# Altium PCB PCB2.PcbDoc (part 3 of 3)
Units mm, origin at the board's own origin, x right, y up, seen from the top; angles counter-clockwise.
Board outline 227.2 x 157.1 mm, 2 copper layers (Top Layer, Bottom Layer); 299 components, 0 nets, 1015 pads, 1172 vias.
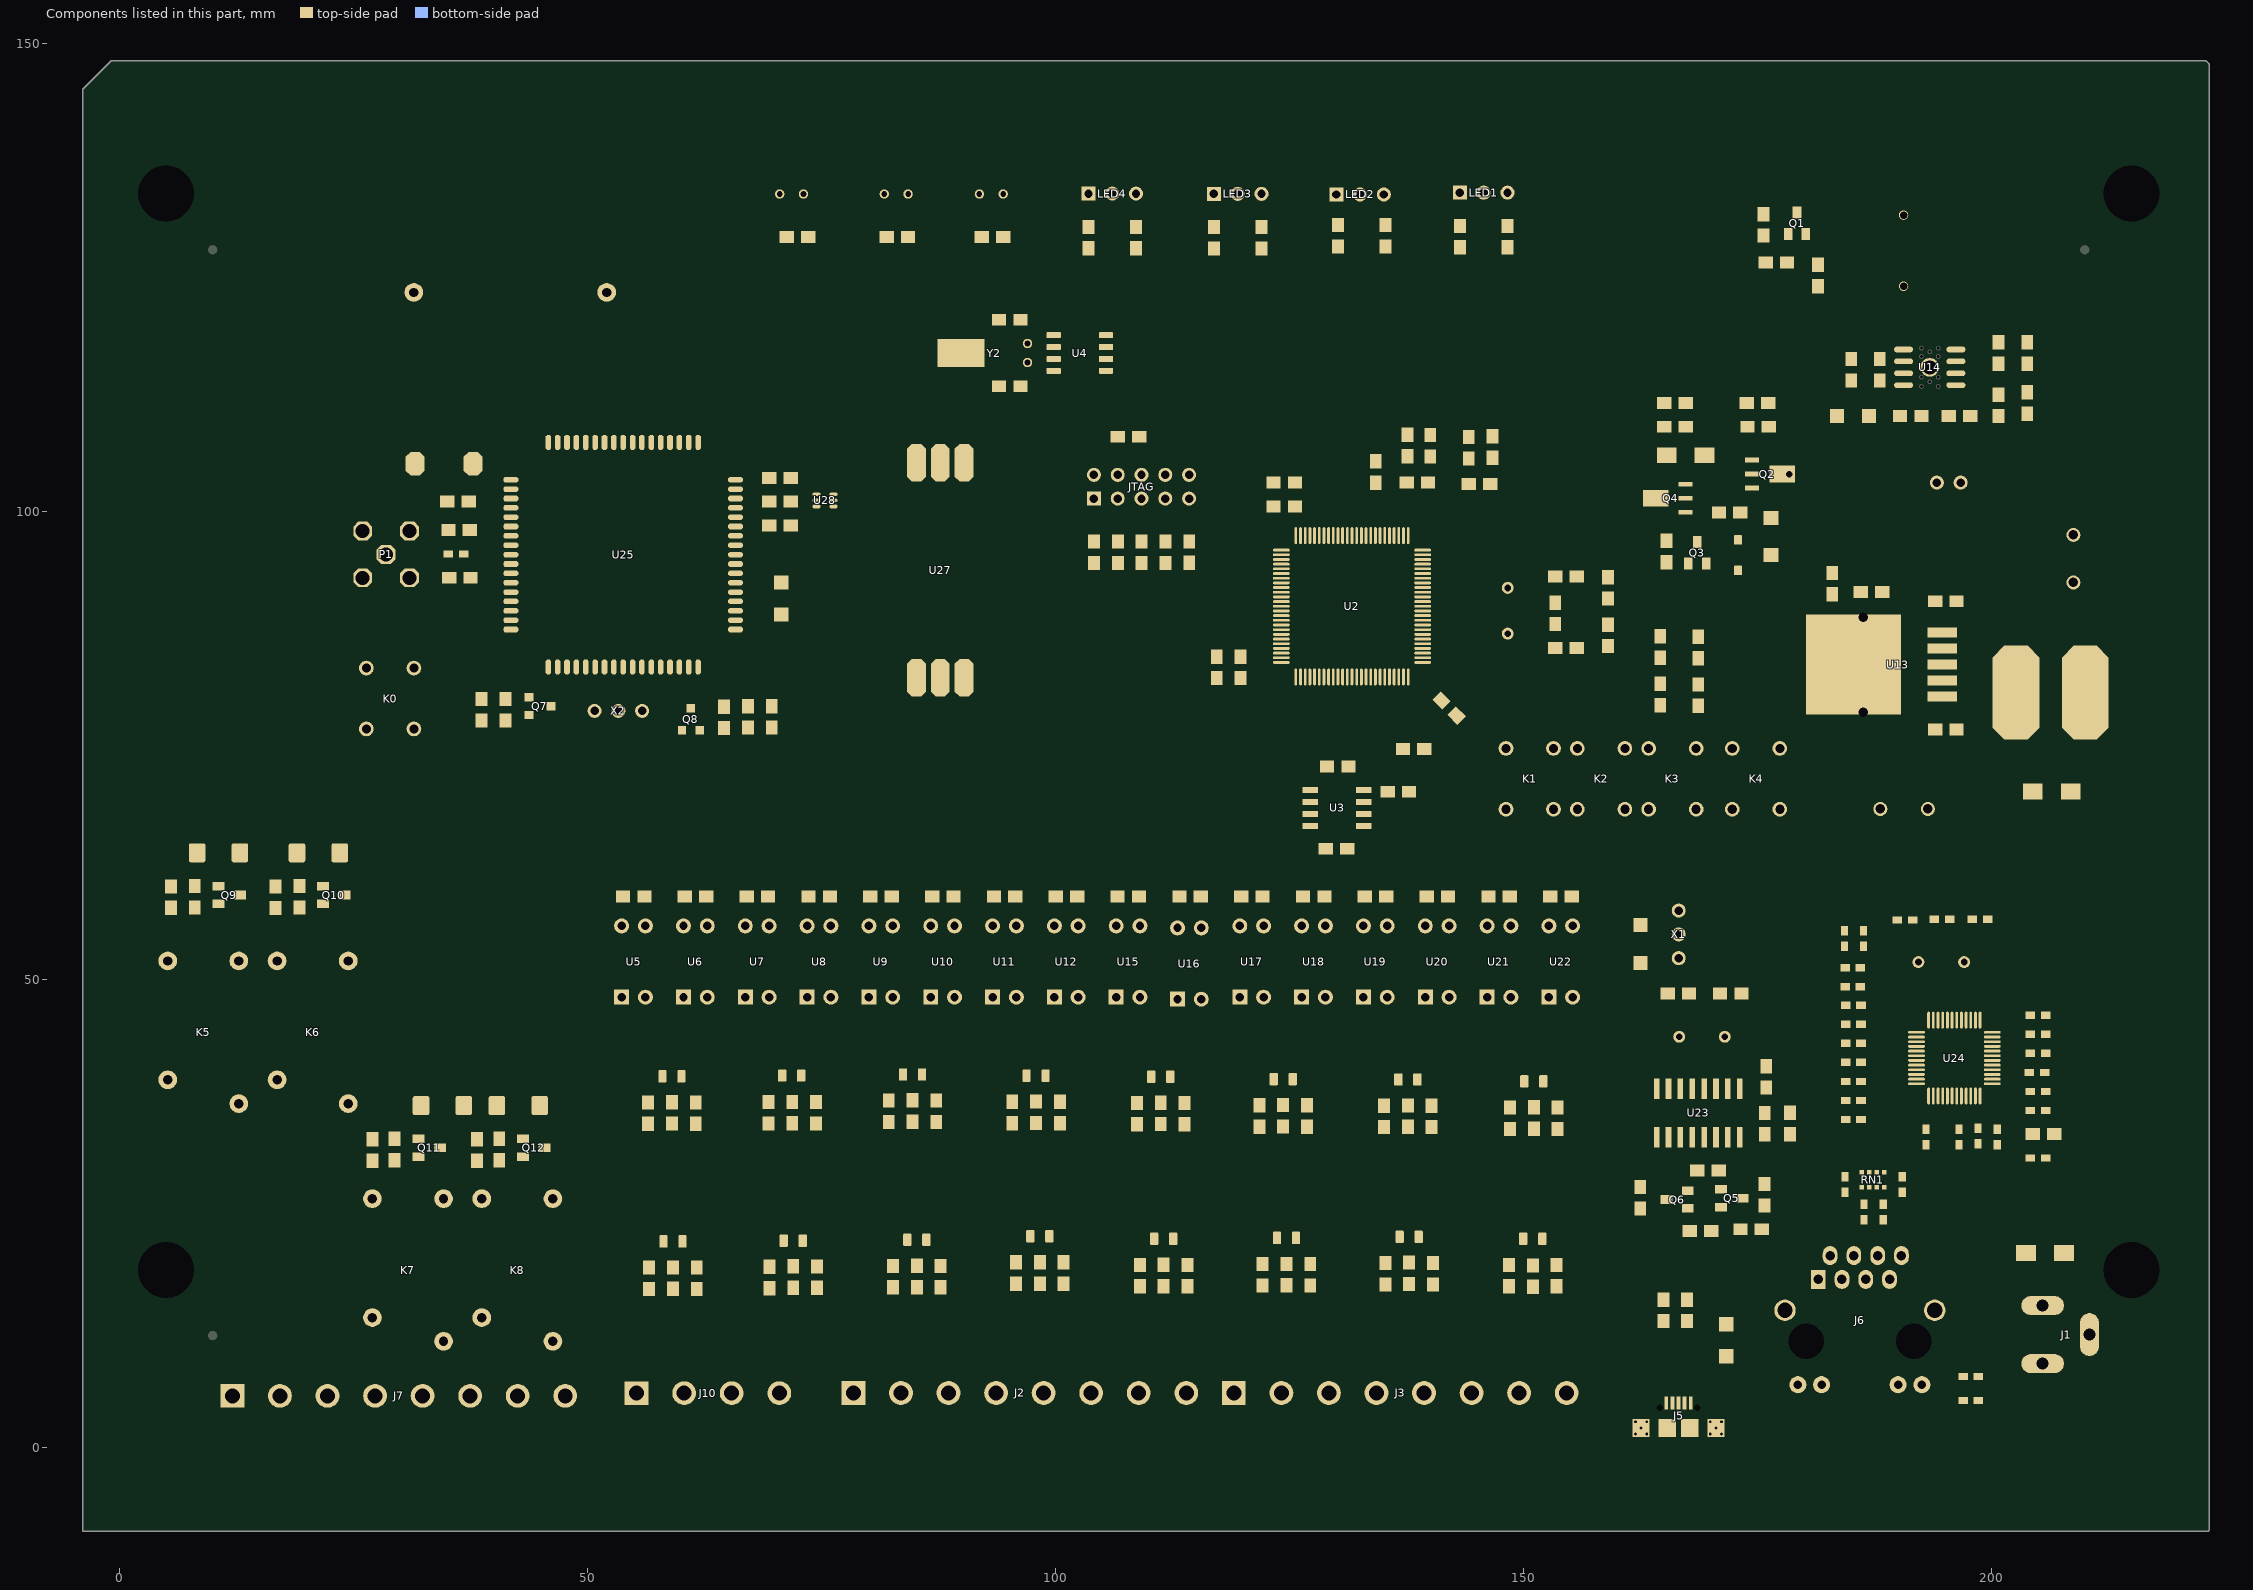
[diagram p3: the components of this part, seen from the top]

## Via types
v1: diameter 0.5, hole 0.3, Top Layer to Bottom Layer, tented both sides, 1160 vias
v2: diameter 1, hole 0.5, Top Layer to Bottom Layer, tented both sides, 8 vias
v3: diameter 0.7, hole 0.5, Top Layer to Bottom Layer, tented both sides, 2 vias
v4: diameter 0.7, hole 0.3, Top Layer to Bottom Layer, tented both sides, 1 vias
v5: diameter 1.2, hole 0.5, Top Layer to Bottom Layer, tented both sides, 1 vias

## Nets (pads, with @x,y where several pads share a name; then routed paths per layer and width w, separated by ;. In a path a pad name is that pad's centre, name@x,y a point inside that pad or via, vN(x,y) a via of type N, cw(c..) or ccw(c..) an arc to the next point about the centre after c; other vN are vias at no path point) (continued)
copper on no net: (continued)
  other v1: 15.2,2.003 160,2.003 176,2.003 20.3,2.203 25.2,2.203 30.1,2.203 35.4,2.303 40.3,2.303 45.2,2.303 48.6,2.303 180,2.503 183.5,2.503 186.5,2.503 192.5,2.503 199,2.503 189.5,3.003 202.5,3.003 205,3.003 207.5,3.003 215,3.503 172,4.003 211.5,4.003 174.7,4.503 217.5,5.503 161,7.003 184.5,7.003 175.8,7.303 211.5,7.503 187.9,8.003 168.7,8.403 71.3,8.703 49.2,8.803 54.8,9.203 194.9,9.203 162,10.003 74.8,11.003 54.2,11.103 168.9,11.203 68.2,11.403 176.3,11.503 213.5,11.803 184,12.003 203.5,12.003 205.5,12.003 207.5,12.003 42.6,12.203 217.2,12.403 49.3,12.503 96.7,12.703 101.8,12.703 198.8,12.803 161,13.003 196.6,13.203 215.6,14.003 53.1,14.203 43.4,14.903 184,15.003 48.4,15.203 180.6,15.203 175.7,15.603 199.2,16.203 212,16.403 57.75,16.987 70.75,17.063 84,17.163 110.25,17.263 149.75,17.263 123.5,17.363 136.5,17.471 196.8,17.503 97,17.539 161,18.003 163,18.003 169,18.003 171.8,18.003 178,18.003 40.2,18.103 45.7,18.203 179.1,19.003 14.6,19.203 173.1,19.303 199.4,19.403 41.8,20.403 64.5,20.603 192.8,20.903 78.2,21.103 91.5,21.403 165,21.503 200.3,21.503 104.9,21.603 118.2,21.603 49.4,21.703 180,21.903 52.6,22.103 144.5,22.203 131,22.403 66.2,22.503 163.9,22.603 63.2,22.703 76.2,22.803 162.5,23.003 90.1,23.203 80,23.403 14.5,23.603 93.2,23.603 47.5,23.903 194.8,24.103 103.9,24.203 107.9,24.403 116,24.403 120,24.503 128.8,24.803 208.8,24.803 8.2,25.003 217,25.003 134.2,25.103 143.5,25.103 169.4,25.303 32,25.503 49.2,25.503 179.8,25.503 183.4,25.503 190.7,25.503 148.7,25.603 184.7,25.803 194,25.903 196.2,26.303 3.8,26.403 169.4,26.503 30.5,26.903 198.4,27.103 14.4,27.303 32.5,27.403 209.8,27.503 193.6,27.703 169.4,27.803 43.6,27.903 180.5,27.903 217.5,28.253 49,28.403 31.1,28.803 179.6,28.903 194.8,29.103 211.8,29.103 8.6,29.203 42.4,29.403 59.6,29.503 5.5,29.603 161.9,29.803 70,30.103 193.4,30.103 66.6,30.203 176.7,30.303 180.6,30.303 79.2,30.403 84.4,30.403 14.5,30.603 195.4,30.703 173,31.003 197.5,31.003 199.5,31.003 202.25,31.003 207.25,31.003 164.1,31.103 176.7,31.203 49.2,31.303 57.7,31.303 179.6,31.303 77.3,31.503 91.8,31.503 95.9,31.603 98.2,31.703 103.4,31.703 106.3,31.703 111.9,31.703 217.5,31.753 63.8,31.903 81.5,31.903 109.7,31.903 68.3,32.003 71.8,32.003 120.5,32.103 122.6,32.103 124.6,32.103 116.1,32.203 118.4,32.203 78.7,32.303 89.1,32.303 138.5,32.303 4.1,32.403 85.4,32.403 134.8,32.403 161.9,32.403 180.5,32.503 83.5,32.603 130.6,32.603 66.1,32.703 202.3,32.703 185.8,33.103 48.9,34.403 32.4,34.503 34.2,34.503 70.5,34.503 30.7,34.603 42.8,34.603 44,34.603 57.75,34.623 39.4,34.703 96.75,34.691 83.5,34.823 217.5,35.003 165.5,35.503 164,36.003 170,36.003 171.5,36.003 173,36.003 47.8,36.403 207,37.003 211.5,37.003 146.1,37.203 116,37.503 178,37.503 143.3,37.603 103.6,37.703 105.5,37.703 119.5,37.703 131.4,37.903 22.3,38.403 91.4,38.403 190.5,38.503 211.75,38.503 218.5,38.503 65.6,38.703 78.6,38.703 117.3,38.703 129,38.703 30.8,38.803 10.7,38.903 190.2,39.203 207,39.253 104.4,39.303 48,39.503 11.1,39.603 90.6,39.603 14.2,39.703 63.7,39.703 195.75,39.753 32,40.003 76.9,40.003 23.8,40.103 8.6,40.203 201.737,40.316 196.467,40.401 178,40.503 45.8,40.603 34.3,40.703 42.2,41.003 207,41.003 211.75,41.003 65.9,41.203 194.5,41.253 195.75,41.253 35.7,41.603 57.7,41.903 59.7,41.903 5.8,42.003 183.5,42.003 22.4,42.103 196.467,42.123 13.3,42.203 10.7,42.403 48.4,42.503 9.2,42.703 32.1,42.703 43.9,42.703 18,42.803 15.8,43.103 207,43.253 28,43.303 196.467,43.451 177.5,43.503 211.75,43.503 218.5,43.503 41.9,43.803 183.5,44.003 35.8,44.203 45.7,44.603 5.9,44.803 17.7,44.803 48,44.803 32.4,45.103 207,45.253 25.1,45.403 199.8,45.403 27.5,45.503 11.2,45.703 40.4,46.003 178,46.003 183.5,46.003 211.75,46.003 8.6,46.103 35.6,46.103 15,46.203 168,46.503 169.5,46.503 171,46.503 44.1,46.703 45.4,47.003 23.3,47.303 27.4,47.303 32.5,47.303 197.3,47.903 183.5,48.003 218.5,48.003 25.4,48.103 48.6,48.103 177.5,48.503 210,48.503 42,48.703 197.75,48.753 35.7,49.003 163.7,49.203 31.7,49.803 166.6,50.203 175.4,50.303 199,50.503 204.5,50.503 208,50.503 212,50.503 40.8,50.603 44.4,50.703 168.8,50.703 159,50.903 33.2,51.003 48.2,51.203 164.5,51.203 195,51.253 36.3,51.503 170.5,52.003 199,52.003 157.5,52.103 172.8,52.503 180,52.503 194.75,52.503 27.1,52.903 218.5,53.003 158.8,53.303 14.8,53.503 191,53.503 199,53.503 206,53.503 210,53.503 178.5,54.003 170.4,54.103 10.2,54.203 2.3,54.303 21.4,54.303 26.1,54.603 190.25,54.753 193.75,54.753 195.25,54.753 14.6,55.303 27.8,55.303 158.9,55.403 177,55.503 19.6,55.603 36.4,55.603 50.9,55.703 8.3,55.803 10,55.903 34,55.903 40.3,56.203 46,56.203 21.8,56.403 169.6,56.403 212,56.503 31.3,56.603 11.2,56.703 204.5,57.003 208,57.003 14.5,57.303 174.9,57.403 158.9,57.503 48.3,57.603 161.7,57.703 43.4,57.803 36.2,57.903 27.7,58.003 218.5,58.003 2.4,58.103 34.3,58.203 31.8,58.903 50.9,59.003 181.6,59.203 40.8,59.403 45.2,59.503 189,59.503 198.5,59.503 210,59.503 36.2,59.703 196,60.003 206.5,60.003 164.7,60.103 111.3,60.303 27.5,60.503 118.7,60.503 191.5,60.503 194.5,60.503 171.9,60.603 70.3,60.703 83.5,60.703 117.2,60.703 154.5,60.703 156.1,60.703 85.1,60.803 103.1,60.803 104.6,60.803 56.8,60.903 58.7,60.903 62.7,60.903 64.7,60.903 81.9,60.903 94.8,60.903 78,61.003 97,61.003 212,61.003 47.7,61.103 98.6,61.103 68.5,61.203 76.1,61.203 33.9,61.403 91.5,61.403 41.1,61.503 50.8,61.503 127.2,61.503 129.3,61.503 131.4,61.503 188.5,61.503 198.5,61.503 204,61.503 88.6,61.603 90.2,61.603 71.8,61.803 118.6,61.803 119.6,61.803 162.8,61.803 44.9,62.003 122.5,62.003 184.5,62.003 193.5,62.003 70.3,62.103 81.9,62.103 55.5,62.203 85.1,62.203 83.4,62.303 133.8,62.403 57.7,62.503 196,62.503 62.1,62.603 63.9,62.603 65.6,62.603 75.1,62.603 77.1,62.703 78.8,62.703 32.1,62.803 170.5,62.803 157.5,62.903 190,63.003 207,63.003 210.5,63.003 179.5,63.103 2.9,63.203 26.9,63.203 70.9,63.403 186.5,63.503 218.5,63.503 35.8,63.603 119.6,63.703 122.5,64.003 126.8,64.003 182,64.003 191.5,64.003 198.5,64.003 204,64.003 26.2,64.503 184.5,65.003 188.5,65.003 179.1,65.203 34.6,65.303 168.2,65.503 191,65.503 37.8,65.603 170.5,65.603 27.4,66.003 172,66.003 25,66.103 145.5,66.303 29.2,66.403 122.5,66.503 154.2,66.503 160.8,66.503 187.5,66.503 130.9,66.803 150.9,66.803 166.3,66.903 182.5,67.003 9,67.303 10.9,67.303 12.8,67.303 14.5,67.303 185.5,67.503 190.5,67.503 213.5,67.503 145.9,68.103 131,68.303 2.8,68.503 122.5,69.003 218.5,69.003 195.5,69.403 199,69.503 211,69.503 150.7,69.803 183.5,70.003 19.7,70.403 161.6,70.403 196.9,70.403 213,70.503 169.9,70.603 86.3,71.303 12.4,71.503 73.9,71.503 122.5,71.503 186,71.503 198.5,71.503 210.5,71.503 146.1,71.803 154.6,71.903 190,72.003 196,72.003 44.8,72.103 6.4,72.203 161.6,72.203 64.6,72.503 127,72.503 40.9,72.703 51.6,73.003 211,73.003 213,73.003 59.5,73.103 154,73.203 169.8,73.303 36.8,73.403 46.9,73.403 85.8,73.503 122.5,73.503 185.5,73.503 198.5,73.503 23.3,73.603 31.2,73.603 34.1,73.803 80.6,73.803 55.7,73.903 69.4,74.003 72.8,74.903 91.9,75.103 145.5,75.103 131.6,75.203 21.3,75.303 76.5,75.303 97.5,75.503 183,75.503 187.5,75.503 190.5,75.503 218.5,75.503 78.6,75.603 82.8,75.703 57.7,75.803 101.5,75.803 87.8,76.003 198.5,76.003 106.9,76.103 5.3,76.303 146.7,76.403 109.9,76.503 63.3,76.679 47,76.803 44.1,76.903 144.8,77.103 93.9,77.403 85.5,77.703 104.7,77.703 11.1,77.803 90.9,77.903 58.1,78.003 198.5,78.003 171.7,78.103 101,78.303 97.9,78.603 160.8,78.603 80.9,78.703 156.7,78.703 78.3,78.803 178.5,79.003 166.6,79.203 111.3,79.303 20.9,79.603 116.3,79.603 108.3,79.703 138.8,79.703 116.5,80.503 154.6,80.503 138.7,80.603 59.1,80.903 34.3,81.003 161,81.003 179,81.003 218.5,81.003 48.7,81.103 50.7,81.103 57.4,81.103 63.8,81.503 102.3,81.503 66,81.603 68.1,81.603 72.9,81.703 75.5,81.703 93.7,81.703 99.5,81.703 79.3,81.903 82.2,82.003 166.5,82.003 105.5,82.103 109.3,82.103 156.5,82.103 141,82.403 6.1,82.503 154.1,82.803 171.5,83.003 178.5,83.003 12.4,83.603 121.2,83.703 160.8,83.903 21.8,84.303 148.3,84.503 198.5,84.503 134.5,84.603 130.7,85.103 121.1,85.303 67.3,85.503 129.3,85.503 64.5,85.703 144.8,85.703 132.2,85.803 134.4,85.803 44.7,85.903 12.9,86.003 178.5,86.003 57.3,86.103 51.5,86.203 141.5,86.403 46.9,86.803 60.7,86.903 198.5,87.003 218.5,87.003 131,87.103 133.1,87.103 134.4,87.203 142.7,87.303 145,87.403 171.5,87.503 156.9,87.603 32.3,87.803 20.7,87.903 214.1,87.903 167,88.003 204.5,88.003 206,88.003 212.4,88.103 6.9,88.303 45.4,88.503 178.5,88.503 57.3,88.603 128.2,88.903 164.7,89.203 28,89.503 83.3,89.503 170.5,89.503 198.5,89.503 207.5,89.503 68.3,89.603 80.3,89.603 106.5,89.603 73.9,89.703 77,89.703 111,89.703 212.8,89.703 51,89.803 94.5,89.803 128.9,89.803 92.3,89.903 60.5,90.003 97,90.003 204.5,90.003 133.8,90.403 135.3,90.403 101.1,90.503 167,90.503 179,90.503 190.5,90.503 130.4,90.803 12.1,90.903 73.1,91.403 128.9,91.403 39.8,91.503 79,91.503 116.5,91.503 119.5,91.503 155.3,91.503 57.3,91.603 132,91.603 68.2,91.803 144.9,91.903 82.5,92.003 198.5,92.003 130.3,92.303 48.9,92.503 191.5,92.503 75.3,92.603 97.7,92.703 92.4,92.903 9,93.003 60.5,93.003 128.9,93.003 179,93.003 135.2,93.103 20.5,93.303 151.4,93.403 39.9,93.503 100.1,93.503 157.4,93.503 130.5,93.603 148.4,93.703 134.3,93.803 170.6,93.803 171.4,93.803 117.5,94.003 218.5,94.003 77.1,94.403 52.4,94.603 57.3,94.703 79.6,94.803 122.4,95.003 212,95.003 215.5,95.003 82.9,95.203 4.5,95.303 209.5,95.503 47.7,95.603 70.5,95.903 117.5,96.003 122.3,96.003 74.6,96.103 60.6,96.203 93.1,96.203 96.5,96.203 186,97.003 188.5,97.003 203.5,97.003 39.5,97.435 57.3,97.503 77.2,97.503 80.5,97.503 180.5,97.503 191.5,97.503 194,97.503 196,97.503 99.2,97.803 21.7,97.903 217,98.003 94.4,98.203 199,98.503 210.5,98.503 214,98.503 83.3,98.603 166.9,98.703 145.1,98.803 158.1,98.803 104.9,98.903 50.8,99.003 103.7,99.003 180.5,99.003 186,99.003 191,99.003 60.6,99.103 150.7,99.103 154.6,99.103 147.4,99.203 5.4,99.403 194,99.503 197.5,99.503 11.8,99.803 140.8,100.003 160.7,100.003 205,100.003 148.5,100.103 156.6,100.103 145.9,100.203 152.7,100.203 57.2,100.503 188.5,100.503 209,100.503 97.1,100.603 28.6,100.803 212.5,101.003 218,101.003 133.6,101.103 150.8,101.503 160.7,101.503 154.6,101.703 24.5,101.803 40.3,101.803 60.6,102.003 186,102.003 215,102.003 93.7,102.103 190,102.503 21.2,102.603 47,102.803 27.8,102.903 100,103.103 57.2,103.303 51.6,103.403 157.2,103.403 96.7,103.903 153.7,104.003 136,104.503 208.5,104.503 212,104.503 214.5,104.503 155.4,104.603 46,104.803 142.2,104.803 40.2,105.003 172,105.003 206.5,105.003 217,105.003 6.1,105.103 126.3,105.203 150.8,105.203 63,105.503 76.5,105.603 159.7,105.603 24,106.003 80.1,106.003 156.1,106.103 203.5,106.503 142.1,106.703 40.9,106.903 157.6,107.103 135.5,107.203 205.5,107.503 26.6,107.603 150.1,107.803 154.3,107.903 201.2,107.903 124.9,108.103 126.3,108.203 142,108.303 40.8,108.703 123.3,108.903 152.5,109.203 163.4,109.203 149.2,109.303 133.2,109.403 135.6,109.503 46.7,109.603 124.9,109.603 156.6,109.603 50.5,109.703 170.5,110.503 12.6,110.803 162.9,110.903 4.8,112.003 182.5,112.203 186.5,112.403 171,112.535 162.5,113.003 188,113.035 179,113.503 18.4,113.535 18.5,113.535 159.7,113.603 133.2,114.003 170,114.003 174.5,114.503 123.2,114.703 64.4,114.735 125.6,114.803 172,115.003 138.5,115.103 82.1,115.135 37,115.235 135.8,115.235 69.6,115.403 80.3,115.403 134.6,115.403 49,115.435 124.1,115.435 176.5,115.503 76.3,115.535 57,115.703 62.9,115.703 72.7,115.835 179,116.003 39.3,116.203 47.6,116.203 52.3,116.203 30,116.535 56.8,116.635 73.8,116.703 170,117.003 138.7,117.035 134.6,117.135 136.5,117.403 162.7,117.403 125.8,117.435 159.6,117.503 139.2,117.603 22,117.703 149,117.703 124.1,117.803 142.2,117.803 182.1,117.803 140.7,117.835 154.9,117.903 121.8,117.935 173,118.003 165.5,118.103 146.1,118.303 28.8,118.403 84.8,118.503 35,118.535 137.1,118.703 123.7,118.735 107.6,118.803 151.5,118.803 161.3,118.803 115.8,118.835 115.8,118.903 169.6,118.903 79.5,118.935 35,119.003 163.9,119.003 175,119.003 185,119.003 143.4,119.135 179,119.503 52.2,119.535 118.4,119.535 134.6,119.603 39.3,119.935 141.2,120.103 120.6,120.135 148.9,120.303 68.6,120.335 135.7,120.335 183.4,120.403 59.4,120.535 138.9,120.535 154.8,120.703 187,120.803 87.5,120.835 75,120.935 143.8,121.235 146.5,121.403 26,121.435 157.8,121.503 152.3,121.603 48.7,121.635 81.2,121.835 136.6,121.903 63.8,121.935 56.3,122.235 90,122.335 98.3,122.335 121.7,122.435 178,122.535 184.5,122.535 95.8,122.635 128,124.235 38.7,124.335 96.5,124.835 170.1,124.935 154.2,125.035 164.2,125.335 172.5,125.535 34.2,126.135 161.6,126.235 132.1,126.435 137.9,126.635 157.7,126.735 140.8,126.835 97.1,127.135 193.7,127.203 92.2,127.335 125.9,127.335 86.7,127.435 89.5,127.535 155.2,127.535 101.1,127.635 170.2,127.635 41.3,127.735 114.7,127.735 127.9,127.735 133.2,127.835 28.7,128.035 139.1,128.335 163.4,128.935 184,129.035 187.5,129.035 191,129.035 56.4,129.835 67.2,129.935 125.9,129.935 46.6,130.035 159.3,130.035 34.5,130.135 152.5,130.135 100.9,130.435 140.6,130.535 171,130.535 114,130.735 158.5,130.735 86.7,131.035 89.7,131.235 155.3,131.335 193.5,131.503 94.5,131.535 79.1,131.835 97.3,131.935 162.4,131.935 138.9,132.035 111.5,132.135 124.7,132.135 127.2,132.235 76.4,132.435 114.6,132.735 87.6,133.135 51.3,133.235 59.9,133.235 43.2,133.335 141,133.535 101.2,133.635 164.4,133.635 192,134.003 152.8,134.035 160.6,134.135 112.5,134.235 156.4,134.235 38.6,134.335 138.5,134.435 173,134.535 183,134.535 66.7,134.635 96.5,134.635 30.4,134.735 77.5,134.735 86.1,134.835 89.9,134.935 125.7,134.935 55.8,135.035 195,135.503 177.5,135.535 189.5,135.535 101.5,136.635 170.5,137.403
  other v3: 168.9,107.303

## Polygon pours and split planes (outlines as drawn)
no net on Bottom Layer "Top Layer-No Net" (solid, remove dead copper, pour order 1000): 6,139.003 1,134.003 1,6.003 6,1.003 11,1.003 214,1.003 219,6.003 219,11.003 219,134.003 214,139.003
no net on Bottom Layer "Top Layer-No Net" (solid, pour order 1000): 189.85,123.003 189.35,122.094 189.35,113.912 189.85,113.003 196.85,113.003 197.35,113.912 197.35,122.094 196.85,123.003
no net on Bottom Layer "Top Layer-No Net" (solid, pour order 1000): 51,38.003 51,3.003 53,1.003 155,1.003 157,1.003 159,3.003 159,12.003 159,49.003 157,51.003 152,51.003 53,51.003 51,49.003
no net on Top Layer "Top Layer-No Net" (solid, remove dead copper, pour order 1001): 6,1.003 1,6.003 1,134.003 6,139.003 11,139.003 214,139.003 219,134.003 219,129.003 219,6.003 214,1.003
no net on Top Layer "Top Layer-No Net" (solid, pour order 1002): 53,51.003 51,49.003 51,3.003 53,1.003 64,1.003 157,1.003 159,3.003 159,49.003 157,51.003

## Other copper
Top Layer:
  rectangle: 176.35,101.003 180.6,107.253
  rectangle: 196.102,39.208 196.824,44.123
  rectangle: 196.494,39.103 196.95,43.003
  rectangle: 196.494,43.003 196.824,44.318
  rectangle: 137.718,82.603 138.45,83.203
  rectangle: 167.902,5.349 168.889,6.269
  rectangle: 161.85,99.103 165.35,107.003
  rectangle: 171.85,103.253 172.85,103.753
  region: 173.625,102.028 174.1,102.503 172.85,103.753 172.375,103.278
  region: 174.1,101.003 174.725,101.628 172.6,103.753 171.975,103.128
  rectangle: 166.6,102.753 172.6,103.753
  region: 193.95,93.203 195.35,94.603 194.35,95.603 192.95,94.203
  region: 199.65,81.303 201.25,82.903 200.35,83.803 198.75,82.203
  region: 201.1,79.453 201.85,80.203 200.1,81.953 199.35,81.203
  region: 182.15,95.003 183.2,96.053 182.45,96.803 181.4,95.753
  region: 182.4,93.803 183.2,94.603 182,95.803 181.2,95.003
  region: 184.25,94.303 185.05,95.103 183.55,96.603 182.75,95.803
  rectangle: 123.336,83.29 124.606,84.026
  rectangle: 41.269,98.149 42.462,100.663
  rectangle: 173.75,99.957 175.25,102.803
  rectangle: 37.412,101.033 38.85,105.903
  rectangle: 172.85,37.703 176.65,39.203
  rectangle: 186.25,109.503 190.85,111.003
  rectangle: 189.65,109.503 190.85,113.703
  rectangle: 192.15,112.903 194.85,118.003
  rectangle: 162.75,99.103 165.55,105.603
  region: 164.15,104.203 165.55,105.603 164.15,107.003 162.75,105.603
  region: 164.997,104.05 166.15,105.203 165.315,106.038 164.162,104.885
  region: 165.816,100.757 166.516,101.457 165.416,102.557 164.716,101.857
  region: 165,99.953 166.25,101.203 165.5,101.953 164.25,100.703
  region: 190.4,83.153 191.15,83.903 189.5,85.553 188.75,84.803
  region: 188.75,81.203 191.05,83.503 189.65,84.903 187.35,82.603
  rectangle: 69.6,33.978 72.225,35.078
  rectangle: 108.675,16.628 111.95,17.903
  rectangle: 95.4,17.103 98.425,18.153
  rectangle: 82.25,16.453 85.7,17.778
  rectangle: 193.5,76.203 194.7,80.603
  region: 194.6,78.703 195.741,79.844 194.936,80.649 193.795,79.508

## Silkscreen, mask and mechanical layers (free items; w line width, h text height)
Top Overlay:
  drawing of 284 lines, arcs and shapes, not listed
  text "RI" at 92.027,123.747 h1.5
  text "STATUS1" at 102,123.735 h1.5
  text "STATUS2" at 115.1,123.735 h1.5
  text "STATUS" at 78.8,123.635 h1.5
  text "STATUS3" at 128.2,123.635 h1.5
  text "STATUS4" at 141.5,123.635 h1.5
  text "NET" at 69.85,123.535 h1.5
  text "V2" at 143.365,114.397 h1 r270
  text "V1" at 159.633,111.56 h1 r315
  text "+" at 200.5,102.703 h1
  text "Li-Po" at 202.9,102.703 h2
  text "V0" at 196.25,95.803 h1 r270
  text "POWER" at 25.7,85.103 h1.5
  text "Source Security V2.2" at 24.35,68.603 h4
  text "20141101" at 62.484,63.808 h2
  text "e_lin Technology" at 35.408,63.757 h2
  text "12VDC_IN" at 199.5,24.003 h2
  text "1" at 77.972,9.325 h2
  text "2" at 83.154,9.325 h2
  text "3" at 88.056,9.325 h2
  text "4" at 92.602,9.325 h2
  text "5" at 97.886,9.325 h2
  text "6" at 103.093,9.325 h2
  text "7" at 108.3,9.325 h2
  text "8" at 113.329,9.325 h2
  text "9" at 118.46,9.325 h2
  text "10" at 122.854,9.325 h2
  text "11" at 128.112,9.325 h2
  text "12" at 132.988,9.325 h2
  text "13" at 138.05,9.203 h2
  text "14" at 143.25,9.103 h2
  text "15" at 148.45,9.103 h2
  text "16" at 153.35,9.103 h2
  text "SGND" at 59.5,9.003 h2
  text "+" at 217.4,8.603 h2
  text "K1" at 13.8,7.903 h1.5
  text "K2" at 23.2,7.803 h1.5
  text "K3" at 33.7,7.803 h1.5
  text "K4" at 43.7,7.803 h1.5
Mechanical 1:
  lines w0.254: 2.5,2.503 5,0.003 ; 5,0.003 215,0.003 ; 5,0.003 5,0.003 ; 5,0.003 0,5.003 0,135.003 5,140.003 215,140.003 220,135.003 220,5.003 ; 5,0.003 5,0.003 ; 215,0.003 220,5.003 ; 215,0.003 220,5.003 ; 215,0.003 215,0.003

## Text inside footprints (layer, text, board x,y; h text height)
JTAG: Top Overlay "1" at 102.245,100.915 h1